# Altium PCB ESC_PCB.PcbDoc
Units mm, origin at the board's own origin, x right, y up, seen from the top; angles counter-clockwise.
Board outline 52 x 30 mm, 4 copper layers (Top Layer, Layer 1, Layer 2, Bottom Layer), stack 0.604 mm thick; 61 components, 52 nets, 200 pads, 128 vias.
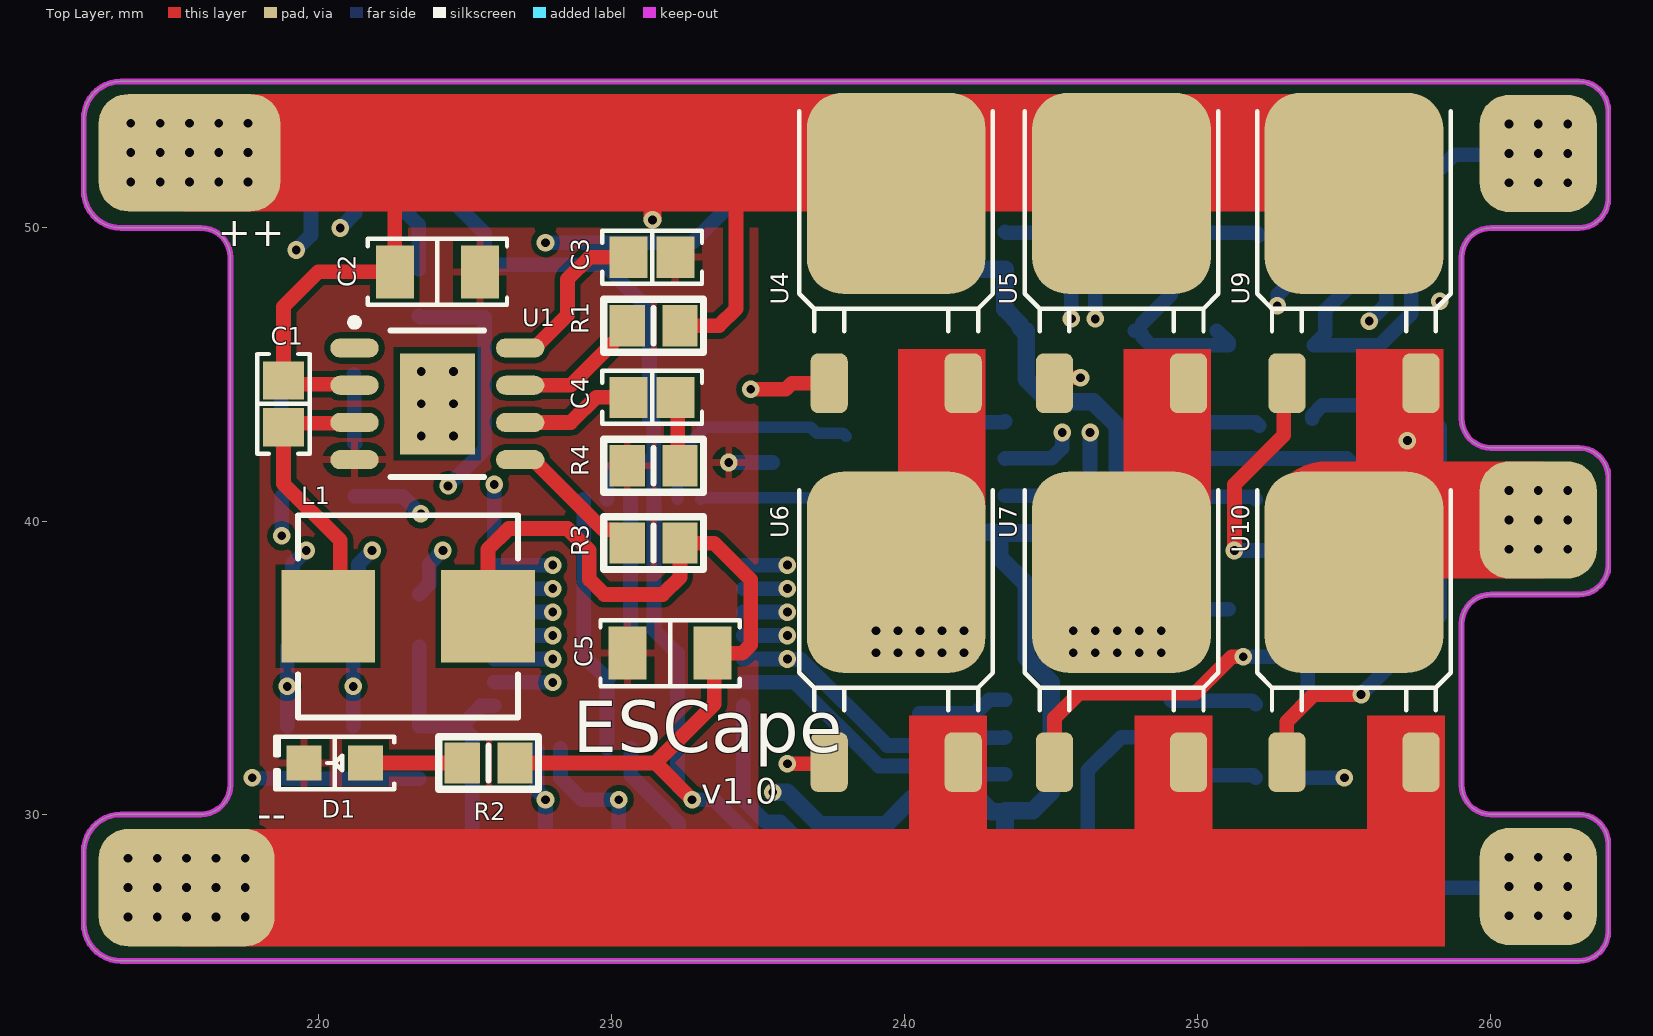
[diagram p0: Top Layer view]
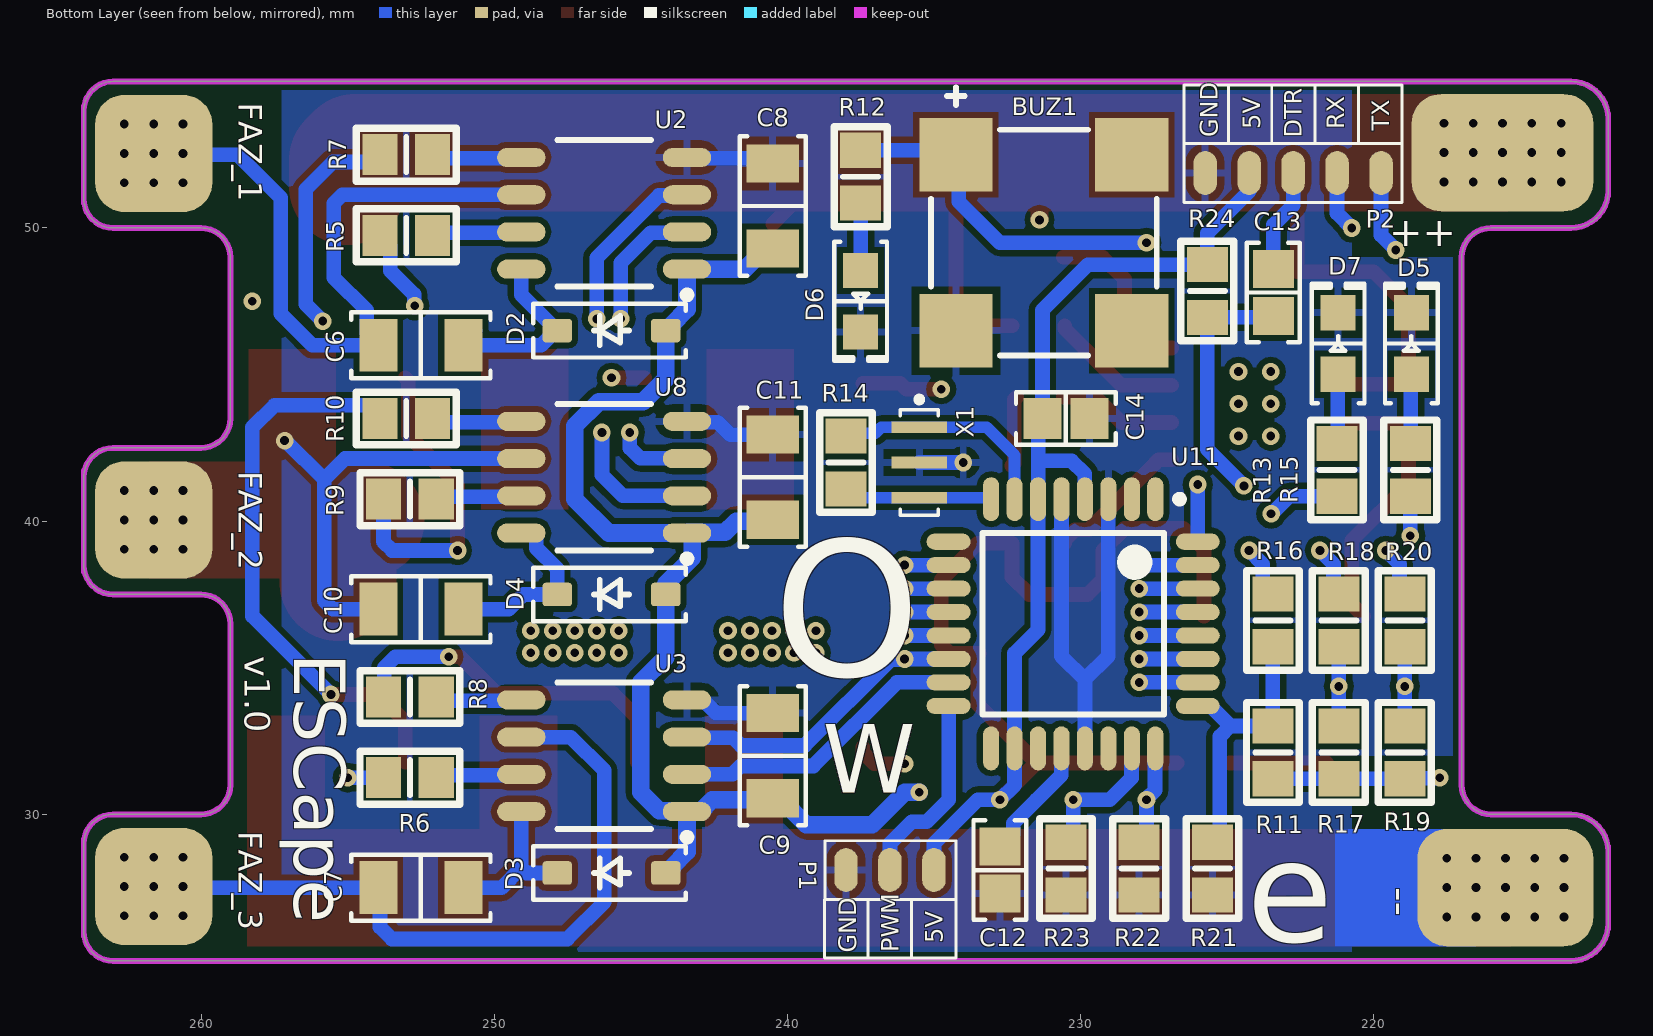
[diagram p1: Bottom Layer view, seen from below]
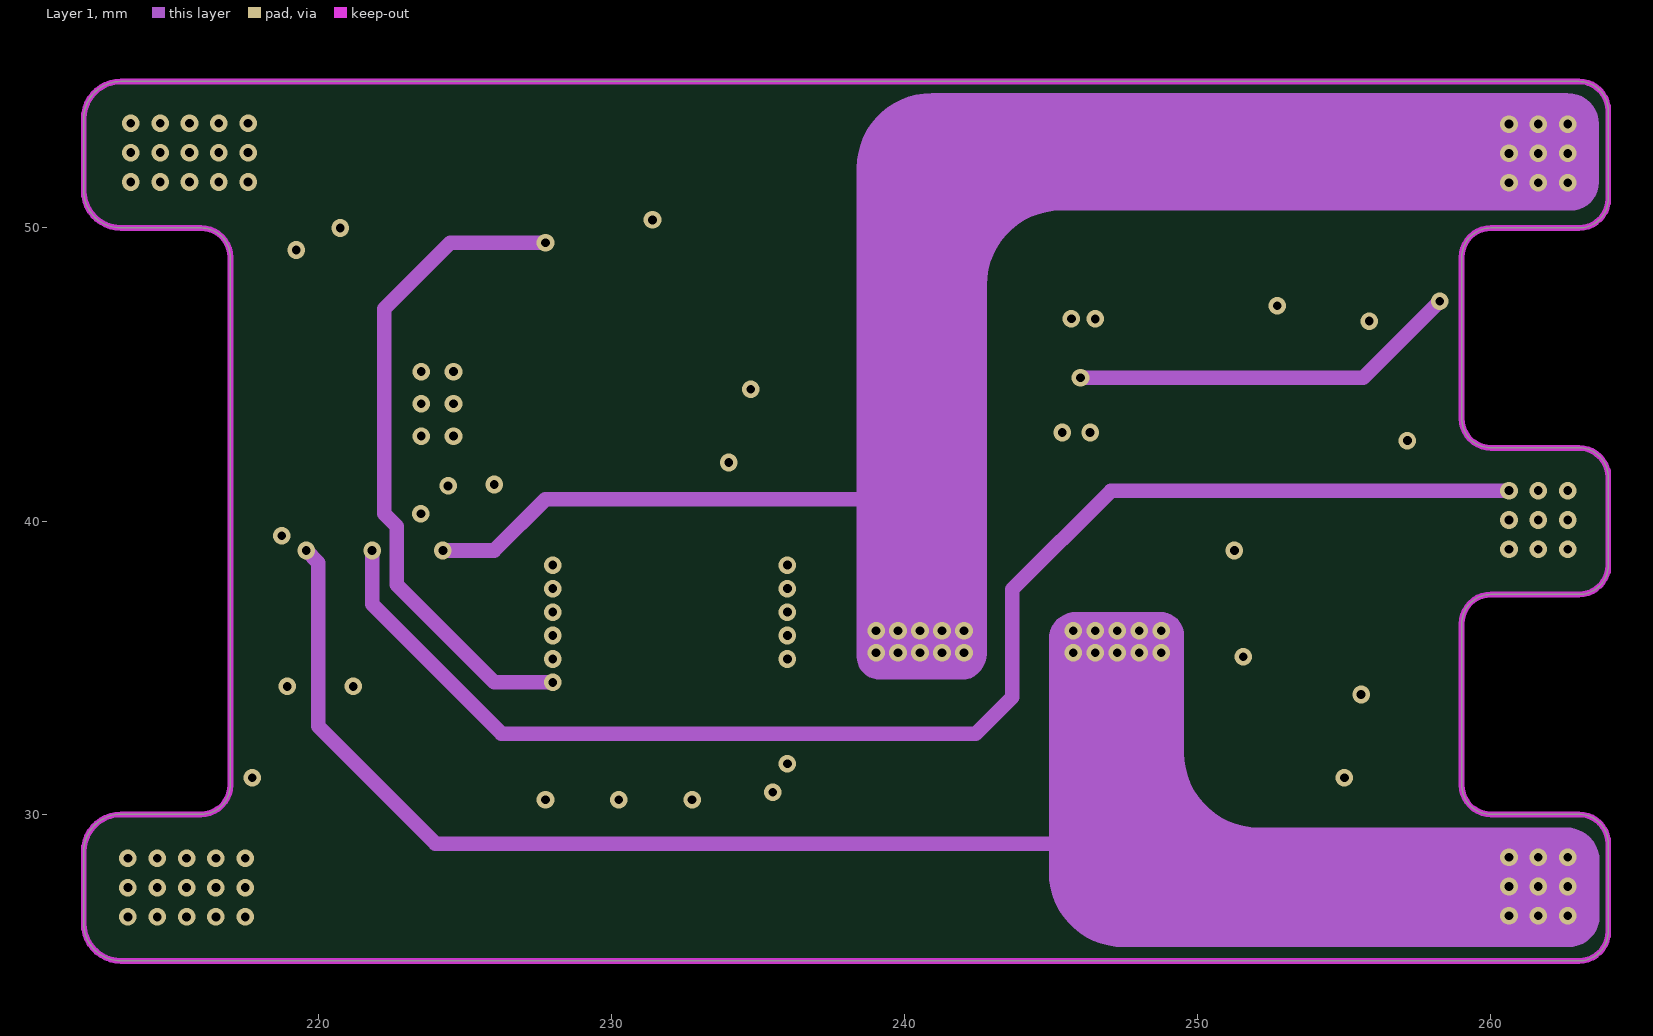
[diagram p2: Layer 1]
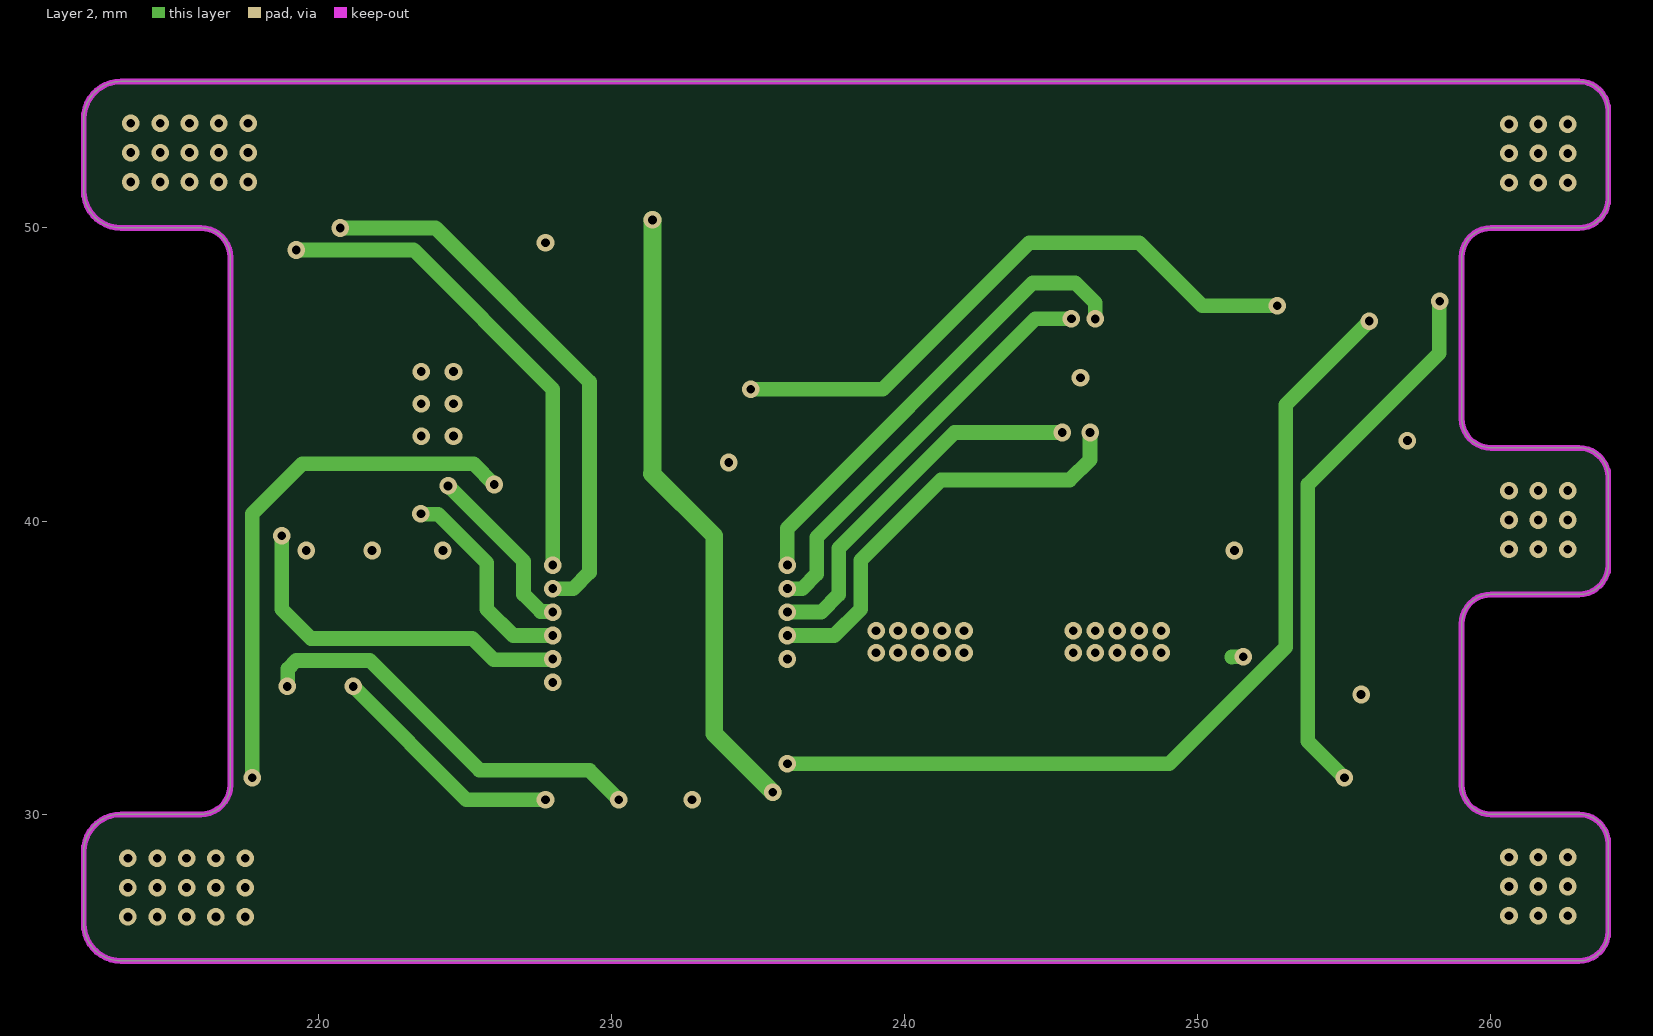
[diagram p3: Layer 2]
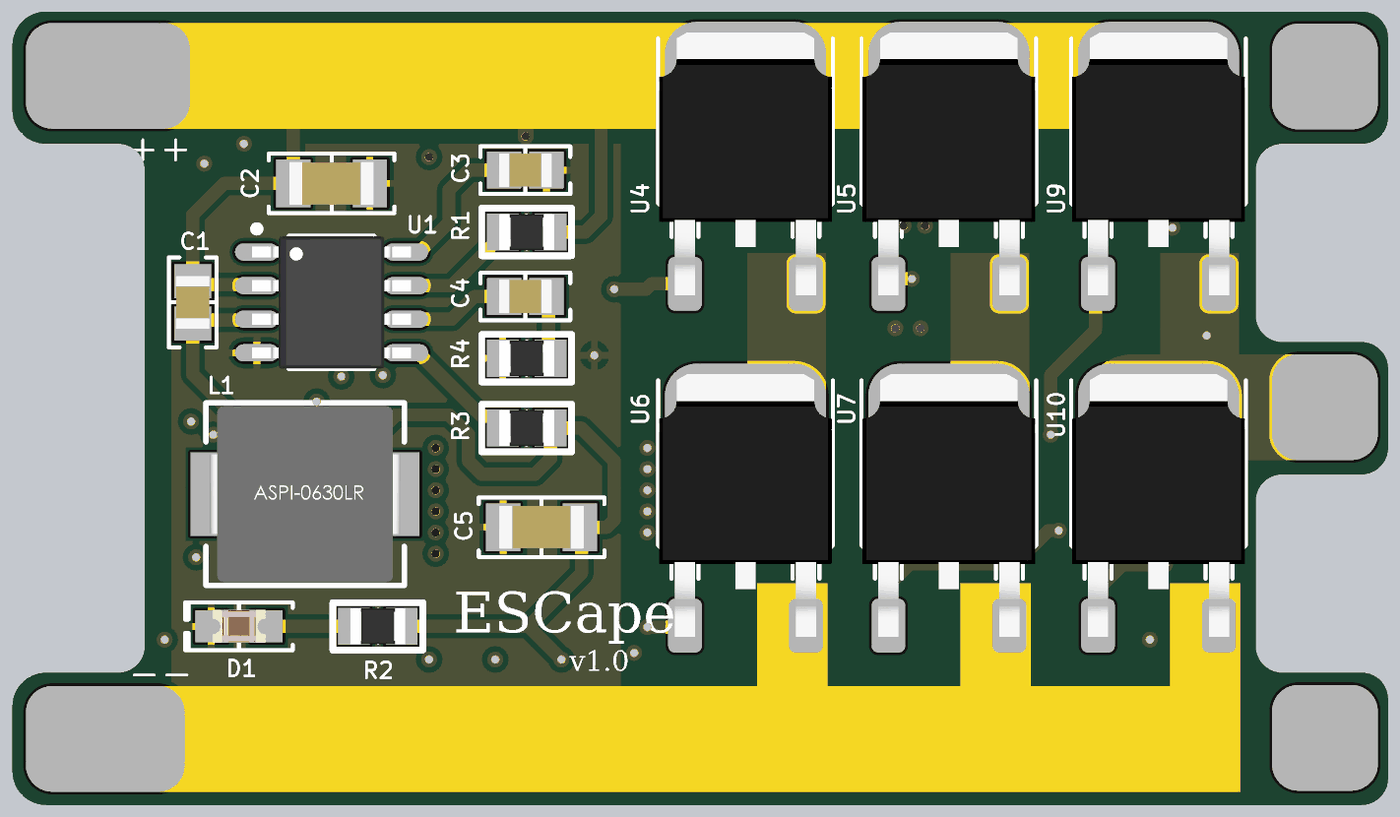
[diagram p4: 3D render of the assembled board from above, using the file's embedded part models]
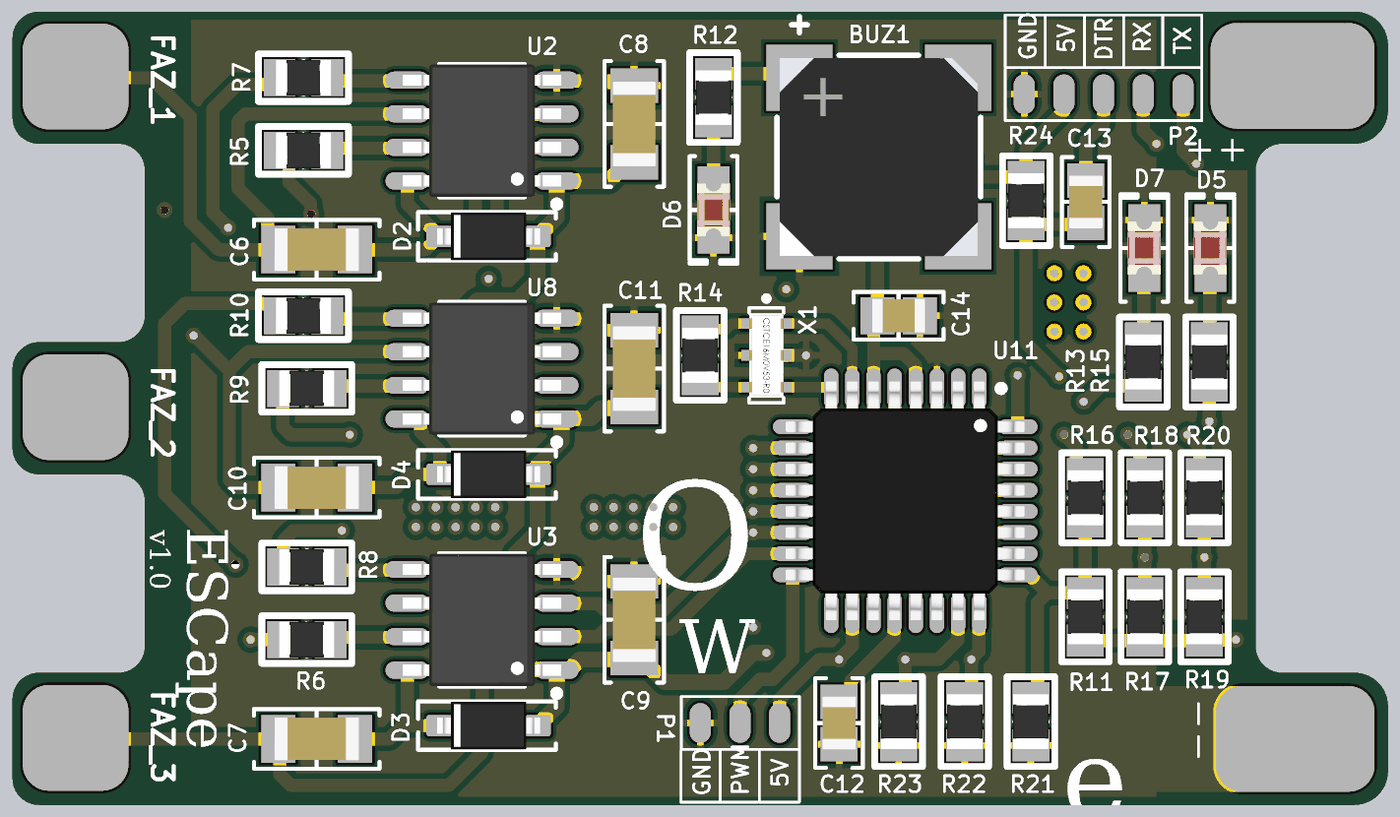
[diagram p5: 3D render of the assembled board from below, using the file's embedded part models]

## Layer stack, top to bottom
Top Solder: solder mask 0.01, Solder Resist, Dk 3.5
Top Layer: signal copper 0.036
Dielectric 2: prepreg 0.0711, PP-006, Dk 4.1
Layer 1: signal copper 0.035
Dielectric 3: prepreg 0.0711, PP-006, Dk 4.1
Layer 2: signal copper 0.035
Dielectric 1: dielectric 0.32, FR-4, Dk 4.8
Bottom Layer: signal copper 0.036
Bottom Solder: solder mask 0.01, Solder Resist, Dk 3.5

## Board outline
212,26.27 ccw(c213.27,26.27) 213.27,25 215,25 260,25 263,25 ccw(c263,26) 264,26 264,29 ccw(c263,29) 263,30 260,30 cw(c260,31) 259,31 259,36.5 cw(c260,36.5) 260,37.5 263,37.5 ccw(c263,38.5) 264,38.5 264,41.5 ccw(c263,41.5) 263,42.5 260,42.5 cw(c260,43.5) 259,43.5 259,49 cw(c260,49) 260,50 263,50 ccw(c263,51) 264,51 264,54 ccw(c263,54) 263,55 260,55 215,55 213.27,55 ccw(c213.27,53.73) 212,53.73 212,51.27 ccw(c213.27,51.27) 213.27,50 216,50 cw(c216,49) 217,49 217,31 cw(c216,31) 216,30 213.27,30 ccw(c213.27,28.73) 212,28.73

## Design rules (kind name [scope] priority, off if disabled: settings)
Clearance [All] p1: gap=0.2 ignorepadtopadclearanceinfootprint=FALSE except(0: Arc-Hole Track-Hole SMDPad-Hole THPad-Hole Via-Hole Fill-Hole Poly-Hole Region-Hole Text-Hole)
PolygonConnect [All] p1: connectstyle=Relief reliefconductorwidth=0.254 reliefentries=4 polygonreliefangle="90 Angle" airgapwidth=0.254
RoutingVias [All] p1: holewidth=0.3 width=0.6 viastyle="Through Hole" minholewidth=0.25 minwidth=0.5 maxholewidth=2.5 maxwidth=5
SilkToSilkClearance [All] p1: silktosilkclearance=0.1
SolderMaskExpansion [All] p1: expansion=0.102 istentingtop=FALSE
Width [All] p1: maxlimit=10 minlimit=0.1 preferedwidth=0.3 minimp=50.000000 maximp=50.000000 favimp=50.000000
29 further rules are at their usual default settings.

## Components (designator, comment, footprint, x,y, rotation, side; value= is the part's Value field where it differs from the comment)
BUZ1 "BUZZER MAGN 3.6V 7.5X7.5MM SMD" "BUZ: CMT-7525" 231.25,49.5 r270 bottom
C1 "CAP CER 10000PF 50V X7R 0805" "CAP 0805/2012" 218.812,44.002 r270 top
C2 "CAP CER 10UF 50V X5R 1206" "CAP 1206/3216" 224.062,48.502 r180 top
C3 "CAP CER 0.1UF 50V X7R 0805" "CAP 0805/2012" 231.387,49.002 r180 top
C4 "CAP CER 3900PF 50V X7R 0805" "CAP 0805/2012" 231.387,44.226 r180 top
C5 "CAP CERAMIC 22UF 16V X7S 20% PAD" "CAP 1206/3216" 232,35.5 r0 top
C6 "CAP CER 2.2UF 50V X5R 1206" "CAP 1206/3216" 252.5,46 r0 bottom
C7 "CAP CER 2.2UF 50V X5R 1206" "CAP 1206/3216" 252.5,27.5 r0 bottom
C8 "CAP CER 10UF 50V X5R 1206" "CAP 1206/3216" 240.5,50.75 r270 bottom
C9 "CAP CER 10UF 50V X5R 1206" "CAP 1206/3216" 240.5,32 r270 bottom
C10 "CAP CER 2.2UF 50V X5R 1206" "CAP 1206/3216" 252.5,37 r0 bottom
C11 "CAP CER 10UF 50V X5R 1206" "CAP 1206/3216" 240.5,41.5 r270 bottom
C12 "CAP CER 0.1UF 50V X7R 0805" "CAP 0805/2012" 232.75,28.098 r270 bottom
C13 "CAP CER 0.1UF 50V X7R 0805" "CAP 0805/2012" 223.425,47.8 r270 bottom
C14 "CAP CER 0.1UF 50V X7R 0805" "CAP 0805/2012" 230.5,43.5 r180 bottom
D1 "Red 645nm LED Indication - Discrete 1.8V 0805" "SMD: LED 0805/2012 RED" 220.562,31.752 r180 top
D2 "1N4148 Diyot" SOD-123 246,46.5 r0 bottom
D3 "1N4148 Diyot" SOD-123 246,28 r0 bottom
D4 "1N4148 Diyot" SOD-123 246,37.5 r0 bottom
D5 "Red 645nm LED Indication - Discrete 1.8V 0805" "SMD: LED 0805/2012 RED" 218.714,46.061 r90 bottom
D6 "Red 645nm LED Indication - Discrete 1.8V 0805" "SMD: LED 0805/2012 RED" 237.5,47.5 r270 bottom
D7 "Red 645nm LED Indication - Discrete 1.8V 0805" "SMD: LED 0805/2012 RED" 221.214,46.061 r90 bottom
L1 "FIXED IND 10UH 4A 68 MOHM SMD" ASPI-0630LR-100M-T15 223.062,36.752 r0 top
P1 "WR-PHD 2.54 mm Angled Socket Header" PWM_CONN 236.5,28.1 r0 bottom
P2 "WR-PHD 2.54 mm Angled Socket Header" TTL_CONN_5 222.75,51.875 r0 bottom
R1 "RES SMD 100K OHM 1% 1/8W 0805" RES_0805 231.439,46.666 r0 top
R2 "RES SMD 100 OHM 1% 1/8W 0805" RES_0805 225.812,31.752 r180 top
R3 "RES SMD 44.2K OHM 1% 1/8W 0805" RES_0805 231.439,39.252 r0 top
R4 "RES SMD 6.8K OHM 1% 1/8W 0805" RES_0805 231.439,41.89 r0 top
R5 "RES SMD 100 OHM 1% 1/8W 0805" RES_0805 253,49.75 r0 bottom
R6 "RES SMD 100 OHM 1% 1/8W 0805" RES_0805 252.877,31.25 r0 bottom
R7 "RES SMD 100 OHM 1% 1/8W 0805" RES_0805 253,52.5 r0 bottom
R8 "RES SMD 100 OHM 1% 1/8W 0805" RES_0805 252.877,34 r0 bottom
R9 "RES SMD 100 OHM 1% 1/8W 0805" RES_0805 252.877,40.75 r0 bottom
R10 "RES SMD 100 OHM 1% 1/8W 0805" RES_0805 253,43.5 r0 bottom
R11 "RES SMD 33K OHM 1% 1/8W 0805" RES_0805 223.439,32.114 r90 bottom
R12 "RES SMD 100 OHM 1% 1/8W 0805" RES_0805 237.5,51.75 r90 bottom
R13 "RES SMD 100 OHM 1% 1/8W 0805" RES_0805 221.25,41.75 r90 bottom
R14 "RES SMD 10K OHM 1% 1/8W 0805" RES_0805 238,42 r270 bottom
R15 "RES SMD 100 OHM 1% 1/8W 0805" RES_0805 218.75,41.75 r90 bottom
R16 "RES SMD 33K OHM 1% 1/8W 0805" RES_0805 223.439,36.614 r90 bottom
R17 "RES SMD 33K OHM 1% 1/8W 0805" RES_0805 221.189,32.114 r90 bottom
R18 "RES SMD 33K OHM 1% 1/8W 0805" RES_0805 221.189,36.614 r90 bottom
R19 "RES SMD 33K OHM 1% 1/8W 0805" RES_0805 218.939,32.114 r90 bottom
R20 "RES SMD 33K OHM 1% 1/8W 0805" RES_0805 218.939,36.614 r90 bottom
R21 "RES SMD 10K OHM 1% 1/8W 0805" RES_0805 225.5,28.15 r90 bottom
R22 "RES SMD 10K OHM 1% 1/8W 0805" RES_0805 228,28.15 r90 bottom
R23 "RES SMD 10K OHM 1% 1/8W 0805" RES_0805 230.5,28.15 r90 bottom
R24 "RES SMD 10K OHM 1% 1/8W 0805" RES_0805 225.675,47.85 r90 bottom
U1 "IC REG BUCK ADJUSTABLE 3A 8SOIC" SOIC8_PAD 224.062,44.002 r0 top
U2 "IC GATE DRVR HALF-BRIDGE 8SOIC" SOIC8 246.25,50.5 r0 bottom
U3 "IC GATE DRVR HALF-BRIDGE 8SOIC" SOIC8 246.25,32 r0 bottom
U4 "MOSFET N-CH 30V 161A DPAK" DPAK 239.711,47.943 r90 top
U5 "MOSFET N-CH 30V 161A DPAK" DPAK 247.4,47.943 r90 top
U6 "MOSFET N-CH 30V 161A DPAK" DPAK 239.711,35.018 r90 top
U7 "MOSFET N-CH 30V 161A DPAK" DPAK 247.4,35.018 r90 top
U8 "IC GATE DRVR HALF-BRIDGE 8SOIC" SOIC8 246.25,41.5 r0 bottom
U9 "MOSFET N-CH 30V 161A DPAK" DPAK 255.325,47.943 r90 top
U10 "MOSFET N-CH 30V 161A DPAK" DPAK 255.325,35.018 r90 top
U11 "IC MCU 8BIT 32KB FLASH 32TQFP" TQFP32 230.25,36.5 r270 bottom
X1 "CERAMIC RES 16.0000MHZ 15PF SMD" CRYSTAL_16MHZ(CTSE16) 235.5,42 r270 bottom

## Footprints (in the part's own frame and the unit in brackets; to place one, negate y for a bottom-side part, rotate by r counter-clockwise, add the part's x,y. Pads: shape width x height; smd on the part's side, far side on the other; paste and mask are expansions set on the pad)
ASPI-0630LR-100M-T15 [mm]
  rect 3.2x3.15 smd: 1(-2.725,0) 2(2.725,0)
  silkscreen extent -3.75,-3.45 3.75,3.45, body extent -3.6,-3.32 3.6,3.33, height 3
"BUZ: CMT-7525" [mm]
  rect 2.5x2.5 smd: 0(-3,3) 0(3,3) 1(-3,-3) 2(3,-3)
  silkscreen extent -5.3,-3.85 3.85,3.85, body extent -3.75,-3.75 3.75,3.75, height 2.5
"CAP 0805/2012" [mm] "Chip Capacitor, 2-Leads, Body 2.00x1.20mm, IPC Medium Density"
  rect 1.3x1.4 smd: 1(-0.8,0) 2(0.8,0)
  silkscreen extent -1.7,-0.9 1.7,0.9, body extent -1,-0.64 1,0.64, height 1.26
"CAP 1206/3216" [mm] "Chip Capacitor, 2-Leads, Body 3.25x1.60mm, IPC Medium Density"
  rect 1.3x1.8 smd: 1(-1.45,0) 2(1.45,0)
  silkscreen extent -2.37,-1.12 2.37,1.12, body extent -1.6,-0.81 1.6,0.81, height 1.62
CRYSTAL_16MHZ(CTSE16) [mm]
  rect 0.4x1.9 smd: 1(-1.2,0) 2(0,0) 3(1.2,0)
  silkscreen extent -2.25,-0.65 1.8,0.65, body extent -1.6,-0.65 1.6,0.65, height 0.9
DPAK [mil] "D-PAK, 3-Pads, Body 6,47x6,54mm (max), IPC Medium Density"
  rrect40% 80x50 smd: 1(-127.5,90) 3(-127.5,-90)
  rrect40% 270x240 smd: 4(127.5,0)
  silkscreen extent -58,-130 238,130, body extent -144,-129 247,129, height 91
PWM_CONN [mm]
  oval 0.8x1.5 smd: 1(-1.5,0) 2(0,0) 3(1.5,0)
  silkscreen extent -2.25,-1 2.22,1
RES_0805 [mm]
  rect 1.2x1.4 smd: 1(-0.9,0) 2(0.9,0)
  silkscreen extent -1.7,-0.9 1.7,0.9, body extent -1.05,-0.68 1.05,0.68, height 0.6
"SMD: LED 0805/2012 RED" [mm] "Chip Diode, 2-Leads, Body 2.00x1.25mm, IPC Medium Density"
  rect 1.2x1.2 smd: 1(-1.05,0) 2(1.05,0)
  silkscreen extent -2.03,-0.9 2.03,0.9, body extent -1,-0.62 1,0.63, height 0.9
SOD-123 [mm] "SOD, 2-Leads, Body 1.55x3.70mm, IPC Medium Density"
  rrect25% 1x0.8 smd: 1(-1.85,0) 2(1.85,0)
  silkscreen extent -2.54,-0.92 2.67,0.92, body extent -1.95,-0.9 1.95,0.9, height 1.18
SOIC8 [mm] "SOIC, 8-Leads, Body 4,90x3,90mm, Pitch 1,27mm, Thermal Pad 3,45x2,56mm, IPC Low Density"
  oval 1.65x0.65 smd: 1(-2.825,1.905) 2(-2.825,0.635) 3(-2.825,-0.635) 4(-2.825,-1.905) 5(2.825,-1.905) 6(2.825,-0.635) 7(2.825,0.635) 8(2.825,1.905)
  silkscreen extent -2.95,-2.5 1.6,2.9, body extent -3,-2.5 3,2.5, height 1.7
SOIC8_PAD [mm] "SOIC, 8-Leads, Body 4,90x3,90mm, Pitch 1,27mm, Thermal Pad 3,45x2,56mm, IPC Low Density"
  oval 1.65x0.65 smd: 1(-2.825,1.905) 2(-2.825,0.635) 3(-2.825,-0.635) 4(-2.825,-1.905) 5(2.825,-1.905) 6(2.825,-0.635) 7(2.825,0.635) 8(2.825,1.905)
  rect 2.56x3.45 smd: 9(0,0)
  silkscreen extent -2.95,-2.5 1.6,2.9, body extent -3,-2.5 3,2.5, height 1.7
TQFP32 [mm] "TQFP, 32-Leads, Body 7,00x7,00mm, Pitch 0,80mm, IPC Medium Density"
  oval 1.5x0.55 smd: 1(-4.25,2.8) 2(-4.25,2) 3(-4.25,1.2) 4(-4.25,0.4) 5(-4.25,-0.4) 6(-4.25,-1.2) 7(-4.25,-2) 8(-4.25,-2.8) 17(4.25,-2.8) 18(4.25,-2) 19(4.25,-1.2) 20(4.25,-0.4) 21(4.25,0.4) 22(4.25,1.2) 23(4.25,2) 24(4.25,2.8)
  oval 0.55x1.5 smd: 9(-2.8,-4.25) 10(-2,-4.25) 11(-1.2,-4.25) 12(-0.4,-4.25) 13(0.4,-4.25) 14(1.2,-4.25) 15(2,-4.25) 16(2.8,-4.25) 25(2.8,4.25) 26(2,4.25) 27(1.2,4.25) 28(0.4,4.25) 29(-0.4,4.25) 30(-1.2,4.25) 31(-2,4.25) 32(-2.8,4.25)
  silkscreen extent -4.37,-3.1 3.1,3.75, body extent -4.51,-4.51 4.51,4.51, height 1
TTL_CONN_5 [mm]
  oval 0.8x1.5 smd: 1(-3,0) 2(-1.5,0) 3(0,0) 4(1.5,0) 5(3,0)
  silkscreen extent -3.71,-1 3.72,1

## Part data
BUZ1: library part Buzzer(CMT-7525-80-SMT-TR), "Buzzers Transducer, Externally Driven Magnetic 3.6V 100mA 2.73kHz 80dB @ 3.6V, 10cm Surface Mount Solder Pads", +Sicaklik=+85, -Sicaklik=-40, Cins=Buzzer, Deger=Buzzer, Kılıf=Nonstandard, Lehim Yöntemi=SMD, MSL="1 (Unlimited)", Uretici Kodu=CMT-7525-80-SMT-TR
C1: library part "10nF 50V 0805", "10000pF ±10% 50V Ceramic Capacitor X7R 0805 (2012 Metric)", +Sicaklik=+125, -Sicaklik=-55, Cins=Kondansator, Deger="10nF 50V", Kılıf=0805, Lehim Yöntemi=SMD, MSL="1 (Unlimited)", Uretici Kodu=CL21B103KBANNNC
C2 C8 C9 C11: library part "10uF 50V 1206", "10µF ±10% 50V Ceramic Capacitor X5R 1206 (3216 Metric)", +Sicaklik=+125, -Sicaklik=-55, Cins=Kondansator, Deger="10uF 50V", Kılıf=1206, Lehim Yöntemi=SMD, MSL="1 (Unlimited)", Uretici Kodu=CL31A106KBHNNNE
C3 C12 C13 C14: library part "100nF 50V 0805", "0.1µF ±10% 50V Ceramic Capacitor X7R 0805 (2012 Metric)", +Sicaklik=+125, -Sicaklik=-55, Cins=Kondansator, Deger="100nF 50V", Kılıf=0805, Lehim Yöntemi=SMD, MSL="1 (Unlimited)", Uretici Kodu=CL21B104KBCNNNC
C4: library part "3.9nF 50V 0805", "3900pF ±10% 50V Ceramic Capacitor X7R 0805 (2012 Metric)", +Sicaklik=+125, -Sicaklik=-55, Cins=Kondansator, Deger="3.9nF 50V", Kılıf=0805, Lehim Yöntemi=SMD, MSL="1 (Unlimited)", Uretici Kodu=CL21B392KBANNNC
C5: library part "22uF 16V 1206", "22µF ±20% 16V Ceramic Capacitor X7S 1206 (3216 Metric)", +Sicaklik=+125, -Sicaklik=-55, Cins=Kondansator, Deger="22uF 16V", Kılıf=1206, Lehim Yöntemi=SMD, MSL="1 (Unlimited)", Uretici Kodu=GRM31CC71C226ME11L
C6 C7 C10: library part "2.2uF 50V 1206", "2.2µF ±10% 50V Ceramic Capacitor X5R 1206 (3216 Metric)", +Sicaklik=+85, -Sicaklik=-55, Cins=Kondansator, Deger="2.2uF 50V", Kılıf=1206, Lehim Yöntemi=SMD, MSL="1 (Unlimited)", Uretici Kodu=CL31A225KBHNNNE
D1 D5 D6 D7: library part LED_Kırmızı, "LED RED DIFFUSED 0805 SMD", +Sicaklik=+125, -Sicaklik=-40, Cins=LED, Deger="KIRMIZI LED", Kılıf=0805, Lehim Yöntemi=SMD, MSL="1 (Unlimited)", Uretici Kodu="LH R974-LP-1"
D2 D3 D4: library part 1N4148, "DIODE GEN PURP 100V 150MA SOD123", +Sicaklik=+150, -Sicaklik=-65, Cins=Diyot, Deger=1N4148, Kılıf=SOD123, Lehim Yöntemi=SMD, MSL="1 (Unlimited)", Uretici Kodu=1N4148W-TP
L1: library part "10uH 4A", "10µH Shielded Molded Inductor 4A 68mOhm Max Nonstandard", +Sicaklik=+125, -Sicaklik=-55, Cins=Bobin, Deger="10uH 4A", Kılıf=Nonstandard, Lehim Yöntemi=SMD, MSL="1 (Unlimited)", Uretici Kodu=ASPI-0630LR-100M-T15
P1: library part HDR(1X3), +Sicaklik=+105, -Sicaklik=-40, Cins=Konnektor, Kılıf="3POS 2.54MM", Lehim Yöntemi=MANUEL, MSL="1 (Unlimited)", Uretici Kodu=613003143121
P2: library part HDR(1X5), +Sicaklik=+105, -Sicaklik=-40, Cins=Konnektor, Kılıf="5POS 2.54MM", Lehim Yöntemi=MANUEL, MSL="1 (Unlimited)", Uretici Kodu=613005143121
R1: library part "100K 0805", "100 kOhms ±1% 0.125W, 1/8W Chip Resistor 0805 (2012 Metric) Moisture Resistant Thick Film", +Sicaklik=+155, -Sicaklik=-55, Cins=Direnc, Deger=100K, Kılıf=0805, Lehim Yöntemi=SMD, MSL="1 (Unlimited)", Uretici Kodu=RC0805FR-07100KL
R2 R5 R6 R7 R8 R9 R10 R12 R13 R15: library part "100R 0805", "100 Ohms ±1% 0.125W, 1/8W Chip Resistor 0805 (2012 Metric) Moisture Resistant Thick Film", +Sicaklik=+155, -Sicaklik=-55, Cins=Direnc, Deger=100R, Kılıf=0805, Lehim Yöntemi=SMD, MSL="1 (Unlimited)", Uretici Kodu=RC0805FR-07100RL
R3: library part "44.2K 0805", "44.2 kOhms ±1% 0.125W, 1/8W Chip Resistor 0805 (2012 Metric) Moisture Resistant Thick Film", +Sicaklik=+155, -Sicaklik=-55, Cins=Direnc, Deger=44.2K, Kılıf=0805, Lehim Yöntemi=SMD, MSL="1 (Unlimited)", Uretici Kodu=RC0805FR-0744K2L
R4: library part "6.8K 0805", "6.8 kOhms ±1% 0.125W, 1/8W Chip Resistor 0805 (2012 Metric) Moisture Resistant Thick Film", +Sicaklik=+155, -Sicaklik=-55, Cins=Direnc, Deger=6.8K, Kılıf=0805, Lehim Yöntemi=SMD, MSL="1 (Unlimited)", Uretici Kodu=RC0805FR-076K8L
R11 R16 R17 R18 R19 R20: library part "33K 0805", "33 kOhms ±1% 0.125W, 1/8W Chip Resistor 0805 (2012 Metric) Moisture Resistant Thick Film", +Sicaklik=+155, -Sicaklik=-55, Cins=Direnc, Deger=33K, Kılıf=0805, Lehim Yöntemi=SMD, MSL="1 (Unlimited)", Uretici Kodu=RC0805FR-0733KL
R14 R21 R22 R23 R24: library part "10K 0805", "10 kOhms ±1% 0.125W, 1/8W Chip Resistor 0805 (2012 Metric) Moisture Resistant Thick Film", +Sicaklik=+155, -Sicaklik=-55, Cins=Direnc, Deger=10K, Kılıf=0805, Lehim Yöntemi=SMD, MSL="1 (Unlimited)", Uretici Kodu=RC0805FR-0710KL
U1: library part MP2307DN, "Buck Switching Regulator IC Positive Adjustable 0.925V 1 Output 3A 8-SOIC (0.154\", 3.90mm Width) Exposed Pad", +Sicaklik=+85, -Sicaklik=-40, Cins=IC, Deger=MP2307DN, Kılıf=8-SOIC, Lehim Yöntemi=SMD, MSL="2A (4 Weeks)", Uretici Kodu=MP2307DN-LF-Z
U2 U3 U8: library part IR2101, "Half-Bridge Gate Driver IC Non-Inverting 8-SOIC", +Sicaklik=+150, -Sicaklik=-40, Cins=IC, Deger=IR2101STRPBF, Kılıf=8-SOIC, Lehim Yöntemi=SMD, MSL="2A (4 Weeks)", Uretici Kodu=IR2101STRPBF
U4 U5 U6 U7 U9 U10: library part IRLR7843, "N-Channel 30V 161A (Tc) 140W (Tc) Surface Mount D-Pak", +Sicaklik=+175, -Sicaklik=-55, Cins=MOSFET, Deger=IRLR7843TRPBF, Kılıf=DPAK(TO-252-3), Lehim Yöntemi=SMD, MSL="1 (Unlimited)", Uretici Kodu=IRLR7843TRPBF
U11: library part ATMEGA328P, "AVR AVR® ATmega Microcontroller IC 8-Bit 20MHz 32KB (16K x 16) FLASH 32-TQFP (7x7)", +Sicaklik=+85, -Sicaklik=-40, Cins=IC, Deger=ATMEGA328P, Kılıf=32-TQFP, Lehim Yöntemi=SMD, MSL="3 (168 Hours)", Uretici Kodu=RC0805FR-07100RL
X1: library part "CRYSTAL 16.0000MHZ(CSTCE16M0V53-R0)", "16MHz Ceramic Resonator Built in Capacitor 15pF ±0.3%  -20°C ~ 80°C Surface Mount", +Sicaklik=+80, -Sicaklik=-20, Cins=Kristal, Deger="16 MHZ 15PF", Kılıf=3-SMD, Lehim Yöntemi=SMD, MSL="1 (Unlimited)", Uretici Kodu=CSTCE16M0V53-R0

## Free pads (board coordinates)
  rrect50% 6.2x4 smd far side: 2(215.606,52.57)
  rrect50% 6x4 smd far side: 3(215.506,27.5)
  rrect50% 4x4 smd far side: 4(261.616,52.544) 5(261.616,40.041) 6(261.616,27.539)
  rrect50% 6x4 smd: ""(215.506,27.5)
  rrect50% 6.2x4 smd: ""(215.606,52.57)
  rrect50% 4x4 smd: ""(261.616,27.539) ""(261.616,40.041) ""(261.616,52.544)

## Via types
v1: diameter 0.6, hole 0.3, Top Layer to Bottom Layer, tented both sides, 122 vias
v2: diameter 0.6, hole 0.3, Top Layer to Bottom Layer, 6 vias

## Nets (pads, with @x,y where several pads share a name; then routed paths per layer and width w, separated by ;. In a path a pad name is that pad's centre, name@x,y a point inside that pad or via, vN(x,y) a via of type N, cw(c..) or ccw(c..) an arc to the next point about the centre after c; other vN are vias at no path point)
+5V: C5.2 C14.1 L1.2 P1.1 P2.4 R2.1 R3.2 R24.2 U11.4 U11.6 U11.18 | length 63.4
  Top Layer w0.5: L1.2 225.787,39.037 226.5,39.75 228.5,39.75 229.239,39.011 229.239,38.011 229.75,37.5 231.75,37.5 232.339,38.089 R3.2 233.498,39.252 234.75,38 234.75,35.793 234.457,35.5 C5.2@233.512,35.5 ; R2.1 231.502,31.752 ; v1(232.75,30.5) 232.75,30.504 231.502,31.752 ; C5.2 C5.2@233.512,35.5 ; 231.502,31.752 233.512,33.762 C5.2@233.512,35.5
  Bottom Layer w0.5: P2.4 224.25,51.25 225.675,49.825 R24.2 229.75,48.75 231.3,47.2 C14.1 231.44,43.36 231.44,42.06 ; U11.4 229.86,40.76 229.86,41.61 230.31,42.06 231.44,42.06 ; P1.1 235,29 233.5,30.5 v1(232.75,30.5) 232.25,31 U11.18 232.25,35.5 231.45,36.3 U11.6 231.44,40.76 231.44,42.06
A0: R19.2 R20.1 R23.2 U11.23 | length 21.4
  Layer 2 w0.5: v1(218.939,34.364) 218.959,34.384 218.959,34.957 219.252,35.25 221.75,35.25 225.5,31.5 229.25,31.5 v1(230.25,30.5)
  Bottom Layer w0.5: R19.2 v1(218.939,34.364) R20.1 ; U11.23 228.26,32.24 228.26,31.24 229,30.5 v1(230.25,30.5) R23.2@230.25,29.05
A1: R17.2 R18.1 R22.2 U11.24 | length 14.2
  Layer 2 w0.5: v1(221.189,34.364) 225.054,30.5 v1(227.75,30.5)
  Bottom Layer w0.5: R17.2 v1(221.189,34.364) R18.1 ; U11.24 227.46,32.24 227.46,30.817 227.75,30.527 v1(227.75,30.5) R22.2@227.75,29.05
A2: R11.2 R16.1 R21.2 U11.25 | length 9.7
  Bottom Layer w0.5: R16.1 R11.2 224.889,33.014 ; R21.2@225.25,29.05 225.25,32.654 224.889,33.014 ; U11.25 225.539,33.7 225.515,33.677 225.515,33.64 224.889,33.014
BUZZ: BUZ1.1 R12.2 U11.26 | length 36.8
  Layer 1 w0.5: v1(227.75,49.5) 224.5,49.5 222.25,47.25 222.25,40.25 222.674,39.826 222.674,37.826 226,34.5 v1(228,34.5)
  Bottom Layer w0.5: U11.26 v1(228,34.5) ; v1(227.75,49.5) 232.75,49.5 234.15,50.9 234.15,52.65 R12.2
DTR: C13.1 P2.3 | length 3.6
  Bottom Layer w0.5: P2.3 222.75,50.775 223.425,50.1 C13.1
FAZ_1: C6.2 pad.4 pad.@261.616,52.544 R16.2 U2.6 U4.3 U6.4 | length 41.5
  Layer 1 w0.5: v1(224.25,39) 226,39 227.75,40.75 238.5,40.75
  Bottom Layer w0.5: R16.2 223.782,37.857 223.782,38.532 v1(224.25,39) ; U2.6 255.178,51.135 255.471,50.842 255.471,48.309 254.35,47.189 254.35,46.4 C6.2 256.199,46 257.279,47.08 257.279,51.029 258.746,52.496 260.568,52.496 v1(260.616,52.544) v1(261.616,52.544)
  other v1: 239.025,35.51 239.775,35.51 240.525,35.51 241.275,35.51 242.025,35.51 239.025,36.26 239.775,36.26 240.525,36.26 241.275,36.26 242.025,36.26 260.616,51.544 261.616,51.544 262.616,51.544 262.616,52.544 260.616,53.544 261.616,53.544 262.616,53.544
FAZ_2: C10.2 pad.5 pad.@261.616,40.041 R18.2 U8.6 U9.3 U10.4 | length 72.6
  Top Layer w4: U10.4@254.375,40.041 v1(260.616,40.041) v1(261.616,40.041) ; U10.4@255.325,37.918 255.325,38.757 U10.4@255.325,38.868
  Layer 1 w0.5: v1(221.837,39) 221.837,37.163 226.25,32.75 242.425,32.75 243.675,34 243.675,37.675 247.041,41.041 v1(260.616,41.041)
  Bottom Layer w0.5: R18.2@221.369,37.857 221.369,38.532 v1(221.837,39) ; U8.6 255.09,42.135 255.8,41.425 ; C10.2 255.507,37 255.8,37.293 255.8,41.425 ; v1(257.15,42.75) 257.125,42.75 255.8,41.425
  other v1: 260.616,39.041 261.616,39.041 262.616,39.041 262.616,40.041 261.616,41.041 262.616,41.041
FAZ_3: C7.2 pad.6 pad.@261.616,27.539 R20.2 U3.6 U5.3 U7.4 | length 59.9
  Layer 1 w0.5: v1(219.587,39) 220,38.587 220,33 224,29 245.5,29
  Bottom Layer w0.5: R20.2@219.119,37.857 219.119,38.532 v1(219.587,39) ; U3.6 247.385,32.635 246.25,31.5 246.25,27 247.5,25.75 253.5,25.75 253.893,26.143 253.893,27.443 C7.2 ; C7.2@254,27.55 C7.2 ; v1(261.616,27.539) 261.577,27.5 C7.2
  other v1: 260.616,26.539 261.616,26.539 262.616,26.539 260.616,27.539 262.616,27.539 260.616,28.539 261.616,28.539 262.616,28.539 245.75,35.51 246.5,35.51 247.25,35.51 248,35.51 248.75,35.51 245.75,36.26 246.5,36.26 247.25,36.26 248,36.26 248.75,36.26
GND: BUZ1.2 C2.1 C3.1 C5.1 C8.1 C9.1 C11.1 C12.2 C14.2 D1.2 D5.2 D6.2 D7.2 P1.3 P2.5 pad.3 pad.@215.506,27.5 R4.1 R21.1 R22.1 R23.1 U1.4 U2.4 U3.4 U6.3 U7.3 U8.4 U10.3 U11.3 U11.5 U11.21 X1.2 | length 66.8
  Top Layer w4: v1(215.506,27.5) v1(216.506,27.5) v1(217.506,27.5) 256.25,27.5
  Bottom Layer w0.5: U11.3 229.05,35.4 229.85,34.6 ; U11.21 229.85,34.6 ; U11.5 230.65,35.4 229.85,34.6 ; v1(234,42) X1.2 ; C9.1 242.429,33.45 242.884,33.905 U3.4 ; C11.1 241.95,42.95 242.376,43.376 243.396,43.376 U8.4 ; C8.1 240.676,52.376 243.396,52.376 U2.4
  other v1: 213.506,26.5 214.506,26.5 215.506,26.5 216.506,26.5 217.506,26.5 213.506,27.5 214.506,27.5 213.506,28.5 214.506,28.5 215.506,28.5 216.506,28.5 217.506,28.5
H_1: U2.2 U11.11 | length 20.3
  Layer 2 w0.5: v1(236,37.7) 236.5,37.7 237,38.2 237,39.451 244.451,46.902 v1(245.687,46.902)
  Bottom Layer w0.5: U11.11 v1(236,37.7) ; U2.2 243.454,49.836 244.664,49.836 245.687,48.813 v1(245.687,46.902)
H_2: U8.2 U11.13 | length 20.8
  Layer 2 w0.5: v1(236,36.1) 237.6,36.1 238.5,37 238.5,38.663 241.242,41.405 245.63,41.405 246.325,42.1 v1@246.325,42.979
  Bottom Layer w0.5: U11.13 v1(236,36.1) ; U8.2 245.615,40.865 246.325,41.575 v1(246.325,43.025)
H_3: U3.2 U11.15 | length 10.2
  Bottom Layer w0.5: U11.15 236.26,34.5 239.11,31.65 241.586,31.65 241.871,31.365 U3.2
L_1: U2.3 U11.10 | length 23.6
  Layer 2 w0.5: v1(236,38.5) 236,39.75 244.375,48.125 245.825,48.125 246.5,47.45 v1(246.5,46.9)
  Bottom Layer w0.5: U11.10 v1(236,38.5) ; U2.3 243.454,51.106 244.384,51.106 246.5,48.99 v1(246.5,46.9)
L_2: U8.3 U11.12 | length 17
  Layer 2 w0.5: v1(236,36.9) 237.15,36.9 237.75,37.5 237.75,39.073 241.702,43.025 v1(245.375,43.025)
  Bottom Layer w0.5: U11.12 v1(236,36.9) ; U8.3 243.435,42.145 245.023,42.145 245.375,42.497 v1(245.375,43.025)
L_3: U3.3 U11.14 | length 10.3
  Bottom Layer w0.5: U11.14 v1(236,35.3) 236.019,35.281 236.469,35.281 239.4,32.35 241.586,32.35 241.85,32.614 243.404,32.614 U3.3
LED_1: R15.1 U11.27 | length 15.8
  Layer 2 w0.5: v1(218.75,39.5) 218.75,37 219.75,36 225.25,36 225.981,35.269 227.898,35.269 227.91,35.281 227.981,35.281 v1(228,35.3)
  Bottom Layer w0.5: v1(218.75,39.5) R15.1 ; U11.27 v1(228,35.3)
LED_2: R13.1 U11.28 | length 11.6
  Layer 2 w0.5: v1(223.5,40.25) 223.519,40.231 224.094,40.231 225.75,38.575 225.75,37 226.65,36.1 v1(228,36.1)
  Bottom Layer w0.5: R13.1 222.873,40.85 223.473,40.25 v1(223.5,40.25) ; U11.28 v1(228,36.1)
NetC1_2: C1.2 L1.1 U1.3 | length 9.9
  Top Layer w0.5: L1.1 220.75,37.165 220.75,39.341 218.812,41.279 C1.2 218.948,43.338 221.208,43.338 U1.3
NetC3_2: C3.2 U1.8 | length 5.7
  Top Layer w0.5: U1.8 227.387,45.907 228.5,47.02 228.5,48.25 229.252,49.002 C3.2
NetC4_1: C4.1 R4.2 | length 2.4
  Top Layer w0.5: C4.1 232.263,44.15 232.263,41.966 R4.2
NetC4_2: C4.2 U1.6 | length 4.1
  Top Layer w0.5: U1.6 228.617,43.367 229.476,44.226 C4.2
NetC6_1: C6.1 D2.2 U2.8 | length 6.4
  Bottom Layer w0.5: D2.2 247.95,46.5 248.1,46.35 248.1,46.293 248.393,46 C6.1 251.05,46.1 C6.1@250.65,46.5 ; D2.2@248.1,46.75 249.075,47.725 U2.8
NetC7_1: C7.1 D3.2 U3.8 | length 5.5
  Bottom Layer w0.5: D3.2 248.9,28 249.075,28.175 ; U3.8 249.075,28.175 ; C7.1 249.75,27.5 249.075,28.175
NetC10_1: C10.1 D4.2 U8.8 | length 6.3
  Bottom Layer w0.5: U8.8 248.634,39.595 248.565,39.526 248.565,39.085 247.85,38.37 D4.2 249,37.5 249.5,37 C10.1
NetC12_1: C12.1 U11.20 | length 4.3
  Bottom Layer w0.5: U11.20 230.66,32.24 230.66,31.34 231.5,30.5 232.3,29.7 232.3,29.298 232.7,28.898 C12.1
NetD1_1: D1.1 R2.2 | length 3.3
  Top Layer w0.5: D1.1 R2.2
NetD5_1: D5.1 R15.2 | length 2.4
  Bottom Layer w0.5: D5.1 218.732,44.993 218.732,42.668 R15.2
NetD6_1: D6.1 R12.1 | length 2.3
  Bottom Layer w0.5: D6.1 R12.1
NetD7_1: D7.1 R13.2 | length 2.4
  Bottom Layer w0.5: D7.1 221.232,44.993 221.232,42.668 R13.2
NetR1_1: R1.1 U1.7 | length 4.6
  Top Layer w0.5: U1.7 228.61,44.637 230.539,46.566 R1.1
NetR3_1: R3.1 U1.5 | length 4.9
  Top Layer w0.5: U1.5 227.346,42.097 227.462,41.981 227.462,41.963 229.723,39.702 230.189,39.702 230.539,39.352 R3.1
NetR5_1: R5.1 U2.7 | length 3.1
  Bottom Layer w0.5: U2.7 249.104,49.836 252.014,49.836 R5.1
NetR5_2: R5.2 U4.1 | length 26.6
  Top Layer w0.5: v1(234.75,44.5) 235.95,44.5 236.155,44.705 U4.1
  Layer 2 w0.5: v1(234.75,44.5) 239.25,44.5 244.25,49.5 248,49.5 250.152,47.348 v1(252.71,47.348)
  Bottom Layer w0.5: v1(252.71,47.348) 252.729,47.367 252.729,47.729 253.55,48.55 253.55,49.4 R5.2
NetR6_1: R6.1 U3.7 | length 2.9
  Bottom Layer w0.5: U3.7 249.104,31.336 251.891,31.336 R6.1
NetR6_2: R6.2 U5.1 | length 34.3
  Top Layer w0.5: U5.1@244.86,44.893 v1(246,44.893)
  Layer 1 w0.5: v1(246,44.893) 255.643,44.893 v1(258.25,47.5)
  Layer 2 w0.5: v1(255,31.25) 253.75,32.5 253.75,41.25 258.231,45.731 258.231,47.481 v1(258.25,47.5)
  Bottom Layer w0.5: R6.2 v1(255,31.25)
NetR7_1: R7.1 U2.5 | length 3.1
  Bottom Layer w0.5: U2.5 249.104,52.376 251.974,52.376 R7.1@252.1,52.25
NetR7_2: R7.2 U6.1 | length 40.4
  Top Layer w0.5: v1(236,31.725) 237.04,31.725 237.425,32.11 U6.1@237.425,32.28
  Layer 2 w0.5: v1(236,31.725) 249.025,31.725 253,35.7 253,43.975 v1(255.85,46.825)
  Bottom Layer w0.5: R7.2@253.9,52.25 255.5,52.25 256.43,51.32 256.43,47.405 v1(255.85,46.825)
NetR8_1: R8.1 U3.5 | length 3
  Bottom Layer w0.5: U3.5 249.104,33.876 251.851,33.876 R8.1@251.977,33.75
NetR8_2: R8.2 U7.1 | length 12.6
  Top Layer w0.5: U7.1 245.114,33.289 245.95,34.125 249.913,34.125 251.163,35.375 v1(251.55,35.375)
  Layer 2 w0.5: 251.157,35.369 251.163,35.375 v1(251.55,35.375)
  Bottom Layer w0.5: v1(251.55,35.375) 253.375,35.375 253.75,35 253.75,34.027 R8.2
NetR9_1: R9.1 U8.7 | length 2.9
  Bottom Layer w0.5: U8.7 249.104,40.836 251.891,40.836 R9.1
NetR9_2: R9.2 U9.1 | length 10.7
  Top Layer w0.5: v1(251.25,39) 251.25,41.25 252.936,42.936 252.936,44.795 U9.1@253.035,44.893
  Bottom Layer w0.5: v1(251.25,39) 253.484,39 253.777,39.293 R9.2
NetR10_1: R10.1 U8.5 | length 3.1
  Bottom Layer w0.5: U8.5 249.104,43.376 251.974,43.376 R10.1@252.1,43.25
NetR10_2: R10.2 U10.1 | length 19.4
  Top Layer w0.5: U10.1 253.039,33.164 253.963,34.088 v1(255.571,34.088)
  Bottom Layer w0.5: R10.2 253.9,43.6 254.25,43.95 254.534,43.95 254.543,43.959 257.491,43.959 258.25,43.2 258.25,36.767 v1(255.571,34.088)
PD2: R11.1 R17.1 R19.1 U11.32 | length 25.9
  Layer 2 w0.5: v1(217.75,31.25) 217.75,40.25 219.453,41.953 225.297,41.953 v1(226,41.25)
  Bottom Layer w0.5: v1(217.75,31.25) 217.768,31.232 218.922,31.232 R19.1 R17.1 R11.1 ; U11.32 v1(226,41.25)
PWM: P1.2 U11.16 | length 6.7
  Bottom Layer w0.5: U11.16 234.5,30.5 235.25,29.75 235.75,29.75 236.5,29 P1.2
RESET: C13.2 R24.1 U11.29 | length 16.6
  Layer 2 w0.5: v1(224.428,41.203) 227,38.631 227,37.5 227.581,36.919 227.981,36.919 v1(228,36.9)
  Bottom Layer w0.5: C13.2 223.475,46.95 R24.1 225.675,42.45 v1(224.428,41.203) ; U11.29 v1(228,36.9)
RX: P2.2 U11.30 | length 22.7
  Layer 2 w0.5: v1(220.75,50) 224,50 229.25,44.75 229.25,38.25 228.7,37.7 v1(228,37.7)
  Bottom Layer w0.5: v1(220.75,50) 221.25,50.5 P2.2 ; U11.30 v1(228,37.7)
TX: P2.1 U11.31 | length 21.5
  Layer 2 w0.5: v1(219.25,49.25) 223.25,49.25 228,44.5 v1(228,38.5)
  Bottom Layer w0.5: v1(219.25,49.25) 219.75,49.75 P2.1 ; U11.31 v1(228,38.5)
VCC: C1.1 C2.2 C8.2 C9.2 C11.2 D2.1 D3.1 D4.1 pad.2 pad.@215.606,52.57 R1.2 U1.2 U2.1 U3.1 U4.4 U5.4 U8.1 U9.4 | length 130.6
  Top Layer w0.5: U1.2 221.208,44.666 218.948,44.666 C1.1 218.812,47.312 220.002,48.502 C2.2 222.612,52.432 222.75,52.57 ; R1.2 233.666,46.666 234.25,47.25 234.25,52.32 234,52.57 ; U4.4@239.217,51.425 U4.4@240.5,50.142
  Top Layer w0.6: 231.35,52.57 231.4,52.52 v1(231.4,50.275)
  Top Layer w4: v1(215.606,52.57) v1(216.606,52.57) v1(217.606,52.57) 222.75,52.57 231.35,52.57 234,52.57 254.75,52.57 255,52.32 U9.4@255,51.425
  Layer 2 w0.6: v1(231.4,50.275) 231.4,41.632 231.384,41.616 233.5,39.5 233.5,32.75 v1(235.5,30.75)
  Bottom Layer w0.6: v1(235.5,30.75) 236,30.75 237.1,29.65 239.35,29.65 240.25,30.55 C9.2 240.55,30.5 242.557,30.5 242.962,30.095 U3.1 243.425,28.725 243.95,28.2 243.95,28.1 244.05,28 D3.1 ; C11.2 240.55,40 241.75,40 242.126,39.624 U8.1@243.348,39.624 ; C8.2 240.75,49.3 241.455,48.595 U2.1 243.425,47.225 243.95,46.7 243.95,46.6 244.05,46.5 D2.1 244.15,44.85 244.925,44.075 246.425,44.075 247.25,43.25 247.25,40.75 246.095,39.595 U8.1 243.396,39.624 U8.1@243.348,39.624 ; U3.1@243.425,30.124 244.374,30.124 245,30.75 245,34.5 244.15,35.35 244.15,37.143 244.143,37.15 244.143,37.857 243.25,38.75 243.25,39.526 U8.1@243.348,39.624
  other v1: 213.606,51.57 214.606,51.57 215.606,51.57 216.606,51.57 217.606,51.57 213.606,52.57 214.606,52.57 213.606,53.57 214.606,53.57 215.606,53.57 216.606,53.57 217.606,53.57
X1: R14.1 U11.7 X1.1 | length 7.8
  Bottom Layer w0.4: U11.7 232.25,42.25 233.2,43.2 X1.1 236.8,43.2 237,43 237.9,43 R14.1
X2: R14.2 U11.8 X1.3 | length 5.1
  Bottom Layer w0.4: U11.8 233.1,40.8 X1.3 237.7,40.8 R14.2
pads on no net: BUZ1.0 U1.1 U1.9 U11.1 U11.2 U11.9 U11.17 U11.19 U11.22
copper on no net:
  other v2: 223.512,42.902 224.612,42.902 223.512,44.002 224.612,44.002 223.512,45.102 224.612,45.102

## Polygon pours and split planes (outlines as drawn)
no net on Layer 1 "NONET_L02_P000" (solid, pour order 0): 243.25,41.25
GND on Top Layer "GND_L01_P003" (solid, remove dead copper, pour order 3): 218,50 235,50 235,27.5 218,27.5
GND on Bottom Layer "GND_L04_P004" (solid, remove dead copper, pour order 4): 216,49 220.75,49 220.75,56.5 257.25,56.5 257.25,23.75 220.75,23.75 220.75,32 216,32

## Keep-outs
Keep-Out Layer:
  lines w0.2: 264,38.27 264,41.73 ; 212,26.27 ccw(c213.27,26.27) 213.27,25 215,25 260,25 263,25 ccw(c263,26) 264,26 264,29 ccw(c263,29) 263,30 260,30 cw(c260,31) 259,31 259,36.5 cw(c260,36.5) 260,37.5 263,37.5 ccw(c263,38.5) 264,38.5 264,41.5 ccw(c263,41.5) 263,42.5 260,42.5 cw(c260,43.5) 259,43.5 259,49 cw(c260,49) 260,50 263,50 ccw(c263,51) 264,51 264,54 ccw(c263,54) 263,55 260,55 215,55 213.27,55 ccw(c213.27,53.73) 212,53.73 212,51.27 ccw(c213.27,51.27) 213.27,50 215.73,50 216,50 cw(c216,49) 217,49 217,31 cw(c216,31) 216,30 215.73,30 213.27,30 ccw(c213.27,28.73) 212,28.73 212,26.27
  lines w0.254: 343.73,0 ccw(c343.73,1.27) 345,1.27

## Other copper
Top Layer:
  rectangle net GND: 255.766,25.5 258.425,33.375
  rectangle net GND: 247.841,25.5 250.501,33.375
  rectangle net GND: 240.152,25.5 242.811,33.375
  rectangle net FAZ_2: 255.389,40.4 258.374,45.875
  rectangle net FAZ_3: 247.464,40.4 250.45,45.875
  rectangle net FAZ_1: 239.775,40.4 242.76,45.875
  region: 256.75,33
  region: 256.75,33
Layer 1:
  region net FAZ_3: 245.85,36.9 248.725,36.9 cw(c248.725,36.1) 249.525,36.1 249.525,32.09 ccw(c252.065,32.09) 252.065,29.55 262.55,29.55 cw(c262.55,28.4) 263.7,28.4 263.7,26.525 cw(c262.65,26.525) 262.65,25.475 247.465,25.475 cw(c247.465,28.015) 244.925,28.015 244.925,35.975 cw(c245.85,35.975)
  region net FAZ_1: 239.975,34.6 242.104,34.6 ccw(c241.898,35.478) 242.8,35.478 242.8,48.06 cw(c245.34,48.06) 245.34,50.6 262.725,50.6 ccw(c262.725,51.55) 263.675,51.55 263.675,53.55 ccw(c262.625,53.55) 262.625,54.6 240.915,54.6 ccw(c240.915,52.06) 238.375,52.06 238.375,35.375 ccw(c239.15,35.375) 239.15,34.6
  region: 236.5,43.75
  region: 241.5,34.75
  region: 244.25,36.75
  region: 244.75,36.5
Bottom Layer:
  rectangle net GND: 216.5,25.497 221.312,29.5
  region: 216.25,29.5

## Silkscreen, mask and mechanical layers (free items; w line width, h text height)
Top Overlay:
  text "++" at 218.85,49.383 h1
  text "ESCape" at 228.673,31.53 h3
  text "v1.0" at 233.056,30.076 h1.5
  text "--" at 218.9,29.525 h1
Bottom Overlay:
  lines w0.1: 219.037,52.875 219.037,54.875 220.517,54.875 ; 220.517,52.875 220.517,54.875 ; 221.997,52.875 221.997,54.875 ; 223.477,52.875 223.477,54.875 ; 224.957,52.875 224.957,54.875 ; 226.437,54.875 224.957,54.875 ; 226.473,52.875 226.473,54.875 ; 234.251,25.1 234.251,27.1 ; 234.287,25.1 235.767,25.1 ; 235.767,27.1 235.767,25.1 ; 237.247,27.1 237.247,25.1 ; 238.727,27.1 238.727,25.1 237.247,25.1 ; 220.517,54.875 221.997,54.875 ; 221.997,54.875 223.477,54.875 ; 223.477,54.875 224.957,54.875 ; 235.767,25.1 237.247,25.1
  text "FAZ_1" at 258.717,54.275 h0.8 r90
  text "RX" at 221,53.375 h0.6 r270
  text "5V" at 223.875,53.375 h0.6 r270
  text "TX" at 219.475,53.325 h0.6 r270
  text "GND" at 225.325,53.1 h0.6 r270
  text "DTR" at 222.45,53.075 h0.6 r270
  text "++" at 217.192,49.373 h1
  text "FAZ_2" at 258.717,41.697 h0.8 r90
  text "ESCape" at 257.395,35.5 h3 r90
  text "v1.0" at 258.799,35.4 h1.5 r90
  text "O" at 240.482,33.169 h8
  text "W" at 238.8,29.975 h4
  text "FAZ_3" at 258.717,29.425 h0.8 r90
  text "--" at 219.55,26.525 h1 r90
  text "5V" at 234.7,25.6 h0.6 r270
  text "PWM" at 236.2,25.3 h0.6 r270
  text "GND" at 237.65,25.275 h0.6 r270
  text "e" at 224.328,24.508 h6
Top Solder:
  rectangle: 255.766,25.5 258.425,33.375
  rectangle: 247.841,25.5 250.501,33.375
  rectangle: 240.152,25.5 242.811,33.375
  lines w4: 217.506,27.5 256.25,27.5 ; 217.606,52.57 222.75,52.57 234,52.57 254.75,52.57